# Altium PCB bc95.PcbDoc
Units mil, origin at the board's own origin, x right, y up, seen from the top; angles counter-clockwise.
Board outline 970.03 x 1995.03 mil, 2 copper layers (Top Layer, Bottom Layer); 47 components, 48 nets, 281 pads, 121 vias.
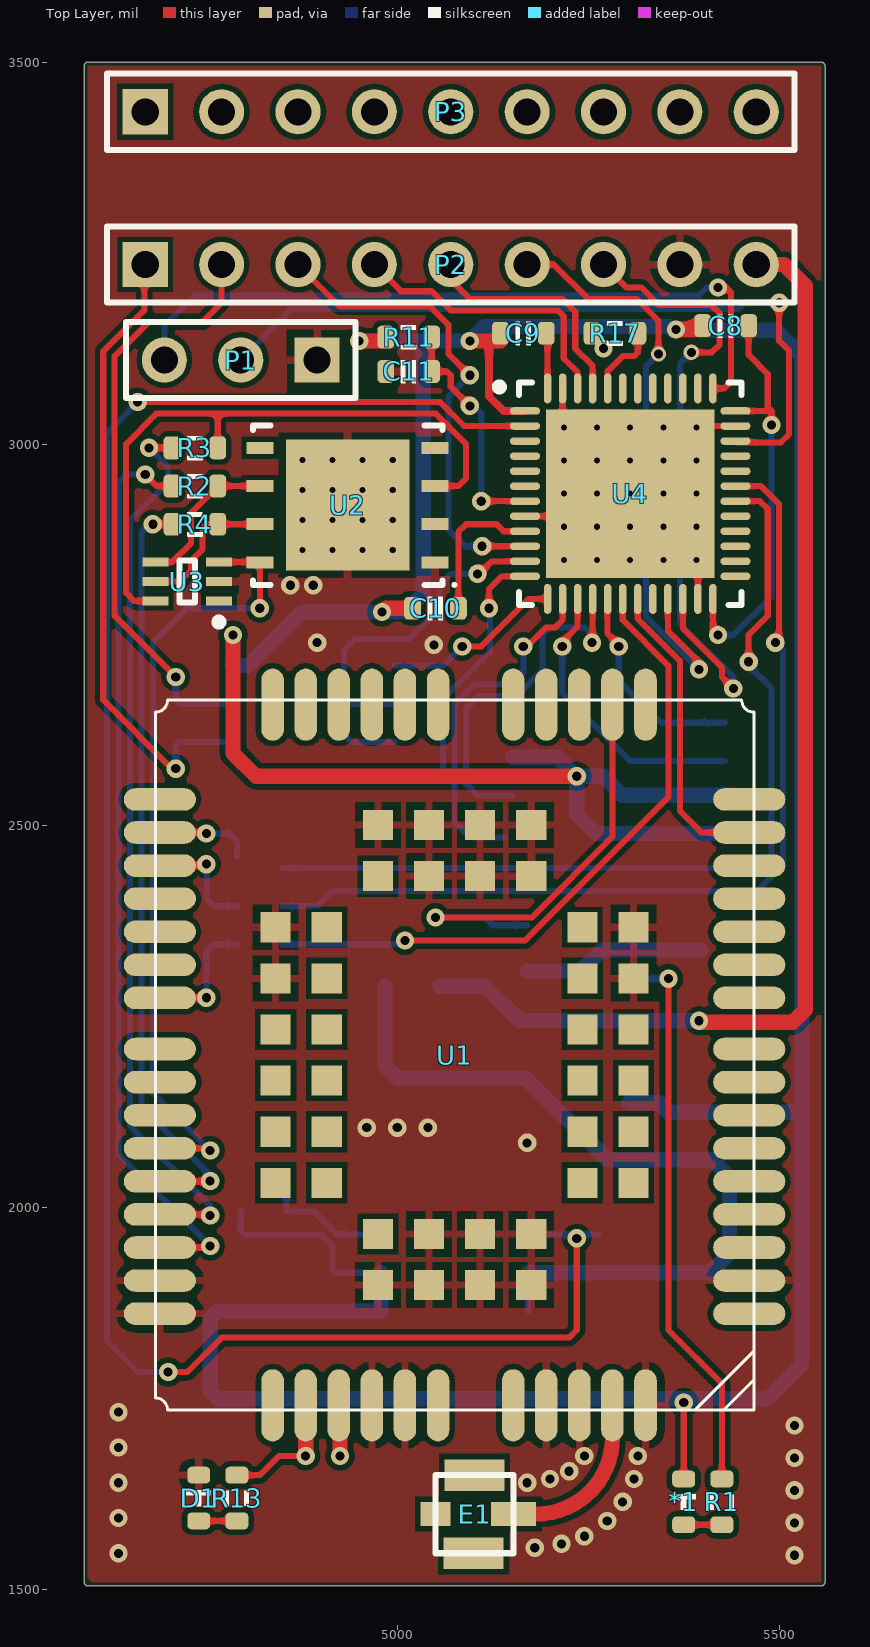
[diagram p0: Top Layer view]
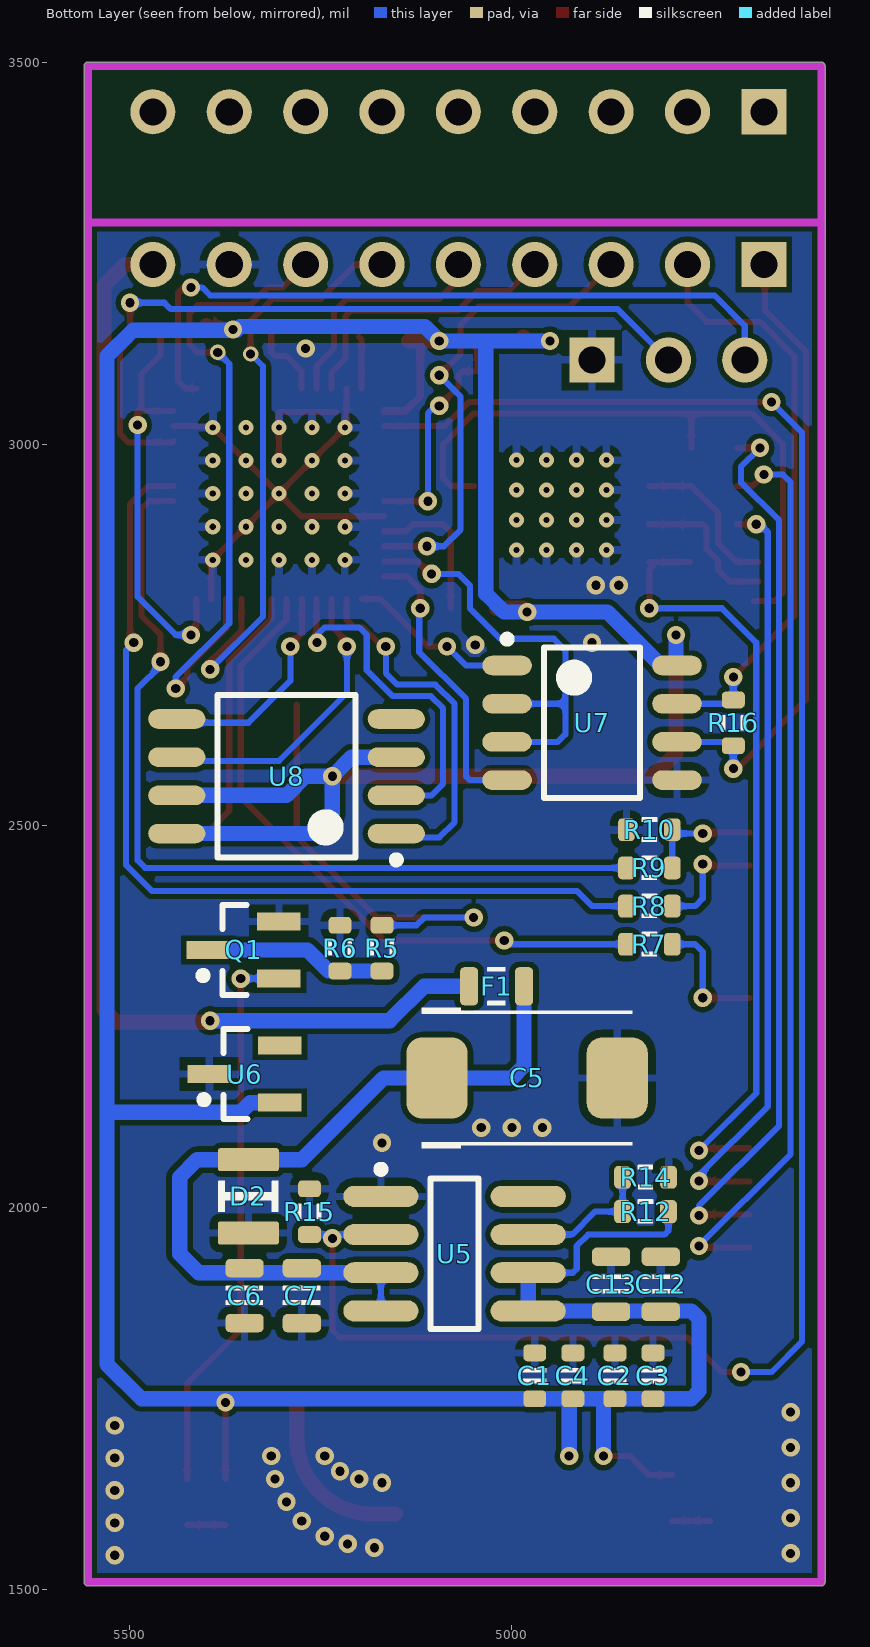
[diagram p1: Bottom Layer view, seen from below]
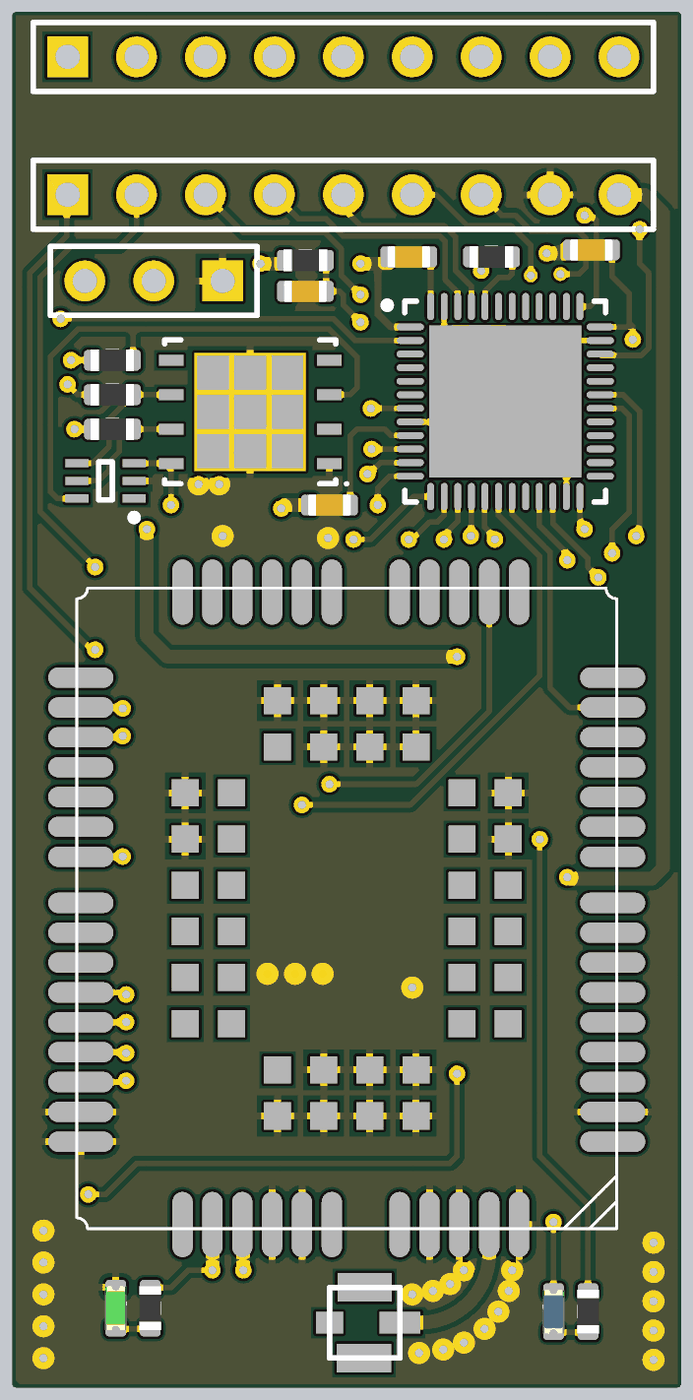
[diagram p2: 3D render of the assembled board from above, using the file's embedded part models]
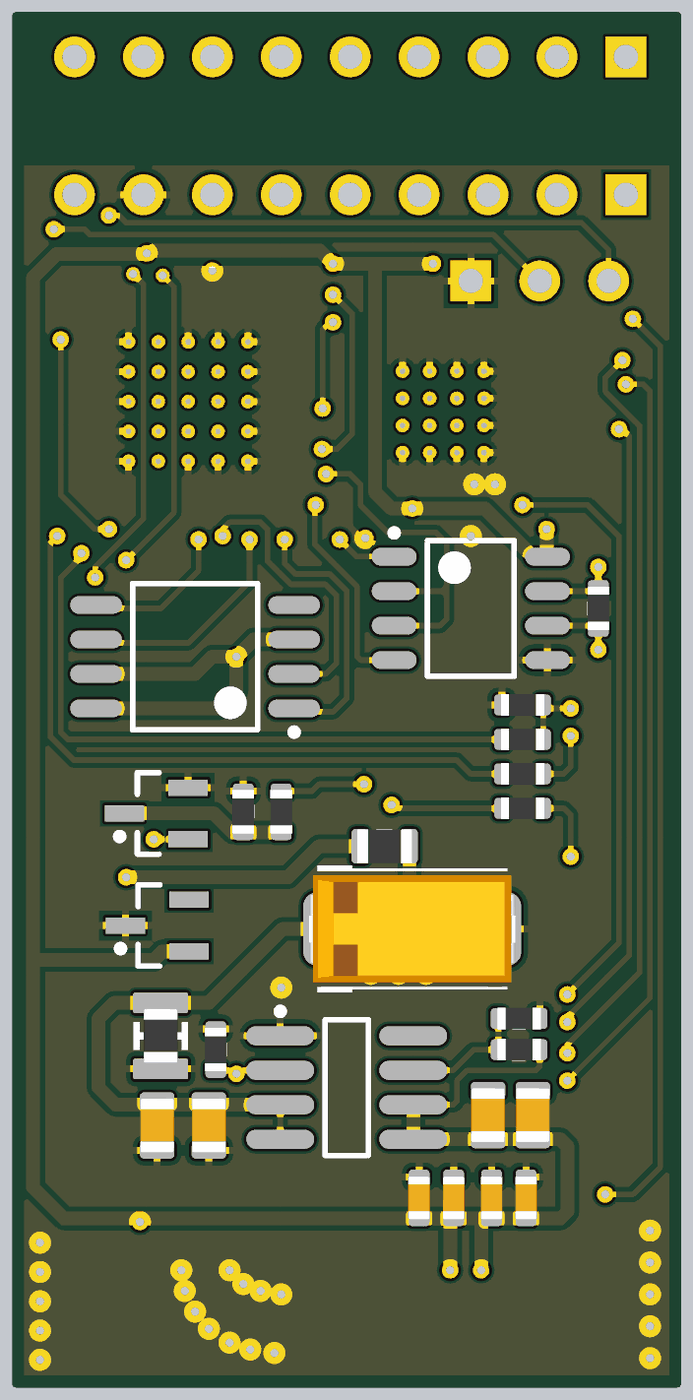
[diagram p3: 3D render of the assembled board from below, using the file's embedded part models]

## Layer stack, top to bottom
Top Solder: solder mask 0.4, Solder Resist, Dk 3.5
Top Layer: signal copper 1.4
Dielectric 1: dielectric 12.6, FR-4, Dk 4.8
Bottom Layer: signal copper 1.4
Bottom Solder: solder mask 0.4, Solder Resist, Dk 3.5

## Board outline
4589.98,1510 4589.98,3240 4589.98,3495 cw(c4595,3495) 4595,3500.01 5555,3500.01 cw(c5555,3495) 5560.01,3495 5560.01,3240 5560.02,1510 cw(c5555,1510) 5555,1504.98 4595,1504.98 cw(c4595,1510)

## Design rules (kind name [scope] priority, off if disabled: settings)
Clearance [All] p1: gap=7 ignorepadtopadclearanceinfootprint=FALSE
PolygonConnect [All] p1: connectstyle=Relief reliefconductorwidth=10 reliefentries=4 polygonreliefangle="90 Angle" airgapwidth=10
RoutingVias [All] p1: holewidth=28 width=50 viastyle="Through Hole" minholewidth=28 minwidth=50 maxholewidth=28 maxwidth=50
SolderMaskExpansion [All] p1: expansion=4
Width [All] p1: maxlimit=40 minlimit=6 preferedwidth=8
30 further rules are at their usual default settings.

## Components (designator, comment, footprint, x,y, rotation, side; value= is the part's Value field where it differs from the comment)
*1 "LED蓝" LED_0603_BLUE 5375,1615 r270 top
C1 "10uF" CAP_0603 4970,1780 r90 bottom
C2 "0.1uF" CAP_0603 4865,1780 r90 bottom
C3 "100pF" CAP_0603 4815,1780 r90 bottom
C4 "22pF" CAP_0603 4920,1780 r90 bottom
C5 "100uF/36V" CAP_TAN_D2917 4980,2170 r180 bottom
C6 "?F" CAP_0805 5350,1885 r90 bottom
C7 "?F" CAP_0805 5275,1885 r90 bottom
C8 "10uF" CAP_0603 5430,3155 r0 top
C9 "10uF" CAP_0603 5165,3145 r0 top
C10 "10uF" CAP_0603 5050,2785 r0 top
C11 "10uF" CAP_0603 5015,3095 r180 top
C12 "?F" CAP_0805 4805,1900 r270 bottom
C13 "?F" CAP_0805 4870,1900 r270 bottom
D1 "GRN" LED_0603_GREEN 4740,1620 r270 top
D2 "TVB035RSC-L" IND_1008 5345,2015 r270 bottom
E1 "Antenna" IPX 5110,1590 r270 top
F1 "16V/1A" RES_0805 5020,2290 r180 bottom
P1 "Header 3" HDR1X3 4895,3110 r180 top
P2 "Header 9" HDR1X9 4670,3235 r0 top
P3 "Header 9" HDR1X9 4670,3435 r0 top
Q1 "S8050" SOT23_M 5351.26,2337.6 r0 bottom
R1 "1K" RES_0603 5425,1615 r270 top
R2 "22R" RES_0603 4735,2945 r0 top
R3 "22R" RES_0603 4735,2995 r0 top
R4 "22R" RES_0603 4735,2895 r0 top
R5 "4.7K" RES_0603 5170,2340 r90 bottom
R6 "47K" RES_0603 5225,2340 r90 bottom
R7 "1K" RES_0603 4820,2345 r0 bottom
R8 "1K" RES_0603 4820,2395 r0 bottom
R9 "1K" RES_0603 4820,2445 r0 bottom
R10 "10K" RES_0603 4820,2495 r0 bottom
R11 "4.7K" RES_0603 5015,3140 r0 top
R12 "61.9K" RES_0603 4825,1995 r0 bottom
R13 "1K" RES_0603 4790,1620 r270 top
R14 "30.1K" RES_0603 4825,2040 r180 bottom
R15 "10K" RES_0603 5265,1995 r90 bottom
R16 "10K" RES_0603 4710,2635 r90 bottom
R17 "4.7K" RES_0603 5285,3145 r0 top
U1 "BC95_NBIOT" BC95 5075,2200 r180 top locked
U2 "USIM_SMD_9n" SON127P600X75_HS-9N 4935,2920 r180 top
U3 "SMF05C" SOT65P210X100-6N 4725,2820 r180 top
U4 "STM32L152CBU6" STM-UFQFPN48_M 5305,2935 r0 top
U5 "TPS76801" SO8_M 5075,1940 r180 bottom
U6 "MAX809SD/RD" SOT23_M 5350,2175 r0 bottom
U7 "MAX485CSA+" MAXM-MAX485CSA+-8_M 4895,2635 r180 bottom
U8 "W25Q16DVSSIG" WINB-W25Q16DVSSIG-8_M 5295,2565 r0 bottom

## Footprints (in the part's own frame and the unit in brackets; to place one, negate y for a bottom-side part, rotate by r counter-clockwise, add the part's x,y. Pads: shape width x height; smd on the part's side, far side on the other; paste and mask are expansions set on the pad)
BC95 [mm]
  oval 2.4x0.75 smd: 1(-9.8,8.6) 2(-9.8,7.5) 3(-9.8,6.4) 4(-9.8,5.3) 5(-9.8,4.2) 6(-9.8,3.1) 7(-9.8,2) 8(-9.8,0.9) 9(-9.8,-0.2) 10(-9.8,-1.9) 11(-9.8,-3) 12(-9.8,-4.1) 13(-9.8,-5.2) 14(-9.8,-6.3) 15(-9.8,-7.4) 16(-9.8,-8.5) 28(9.8,-8.5) 29(9.8,-7.4) 30(9.8,-6.3) 31(9.8,-5.2) 32(9.8,-4.1) 33(9.8,-3) 34(9.8,-1.9) 35(9.8,-0.2) 36(9.8,0.9) 37(9.8,2) 38(9.8,3.1) 39(9.8,4.2) 40(9.8,5.3) 41(9.8,6.4) 42(9.8,7.5) 43(9.8,8.6)
  oval 0.75x2.4 smd: 17(-6.35,-11.65) 18(-5.25,-11.65) 19(-4.15,-11.65) 20(-3.05,-11.65) 21(-1.95,-11.65) 22(0.55,-11.65) 23(1.65,-11.65) 24(2.75,-11.65) 25(3.85,-11.65) 26(4.95,-11.65) 27(6.05,-11.65) 44(6.05,11.65) 45(4.95,11.65) 46(3.85,11.65) 47(2.75,11.65) 48(1.65,11.65) 49(0.55,11.65) 50(-1.95,11.65) 51(-3.05,11.65) 52(-4.15,11.65) 53(-5.25,11.65) 54(-6.35,11.65)
  rect 1x1 smd: 55(-5.95,4.25) 56(-5.95,2.55) 57(-5.95,0.85) 58(-5.95,-0.85) 59(-5.95,-2.55) 60(-5.95,-4.25) 61(-2.55,-7.65) 62(-0.85,-7.65) 63(0.85,-7.65) 64(2.55,-7.65) 65(5.95,-4.25) 66(5.95,-2.55) 67(5.95,-0.85) 68(5.95,0.85) 69(5.95,2.55) 70(5.95,4.25) 71(2.55,7.65) 72(0.85,7.65) 73(-0.85,7.65) 74(-2.55,7.65) 75(-4.25,4.25) 76(-4.25,2.55) 77(-4.25,0.85) 78(-4.25,-0.85) 79(-4.25,-2.55) 80(-4.25,-4.25) 81(-2.55,-5.95) 82(-0.85,-5.95) 83(0.85,-5.95) 84(2.55,-5.95) 85(4.25,-4.25) 86(4.25,-2.55) 87(4.25,-0.85) 88(4.25,0.85) 89(4.25,2.55) 90(4.25,4.25) 91(2.55,5.95) 92(0.85,5.95) 93(-0.85,5.95) 94(-2.55,5.95)
  silkscreen extent -9.95,-11.8 9.95,11.8
CAP_0603 [mil]
  rrect50% 22x30 smd: 1(-30,0) 2(30,0)
  silkscreen extent -10,-15 10,15, body extent -31,-16 31,16, height 31
CAP_0805 [mil]
  rrect50% 24x50 smd: 1(-36,0) 2(36,0)
  silkscreen extent -12,-24 12,24, body extent -39,-25 39,25, height 39
CAP_TAN_D2917 [mil]
  rrect50% 80x106 smd: 1(-118,0) 2(118,0)
  silkscreen extent -138,-92 138,92, body extent -150,-78 150,78, height 122
HDR1X3 [mm] "Connector; Header; 3 Position"
  rect 1.5x1.5 hole 0.9: 1(0,0)
  round 1.5 hole 0.9: 2(2.54,0) 3(5.08,0)
  silkscreen extent -1.27,-1.27 6.35,1.27
HDR1X9 [mm] "Connector; Header; 9 Position"
  rect 1.5x1.5 hole 0.9: 1(0,0)
  round 1.5 hole 0.9: 2(2.54,0) 3(5.08,0) 4(7.62,0) 5(10.16,0) 6(12.7,0) 7(15.24,0) 8(17.78,0) 9(20.32,0)
  silkscreen extent -1.27,-1.27 21.59,1.27
IND_1008 [mil]
  rrect20% 30x80 smd: 1(-48,0) 2(48,0)
  silkscreen extent -20,-39 20,39, body extent -39,-25 39,25, height 39
IPX [mil]
  rect 41.5x78.74 smd: 0(-60,-9) 0(42.36,-10)
  rect 31.5x59.05 smd: 1(-9,42.36)
  rect 31.5x39.37 smd: ""(-9,-60)
  silkscreen extent -60,-60 42,42
LED_0603_BLUE [mil]
  rrect50% 22x30 smd: 1(-30,0) 2(30,0)
  silkscreen extent -10,-16 10,16, body extent -32,-16 32,16, height 24
LED_0603_GREEN [mil]
  rrect50% 22x30 smd: 1(-30,0) 2(30,0)
  silkscreen extent -10,-16 10,16, body extent -32,-16 32,16, height 24
MAXM-MAX485CSA+-8_M [mm] "SOIC, 8-Leads, Body 5x4mm, Pitch 1.27mm, IPC Low Density"
  oval 1.65x0.65 smd: 1(-2.825,1.905) 2(-2.825,0.635) 3(-2.825,-0.635) 4(-2.825,-1.905) 5(2.825,-1.905) 6(2.825,-0.635) 7(2.825,0.635) 8(2.825,1.905)
  silkscreen extent -2.95,-2.5 1.6,2.9, body extent -2,-2.5 2,2.5, height 1.75
RES_0603 [mil]
  rrect50% 22x30 smd: 1(-30,0) 2(30,0)
  silkscreen extent -10,-16 10,16, body extent -31,-16 31,16, height 18
RES_0805 [mil]
  rrect50% 24x50 smd: 1(-36,0) 2(36,0)
  silkscreen extent -12,-24 12,24, body extent -39,-25 39,25, height 24
SO8_M [mm] "SOIC, 8-Leads, Body 4.9x3.9mm, Pitch 1.27mm, IPC Low Density"
  oval 2.5x0.7 smd: 1(-2.45,1.905) 2(-2.45,0.635) 3(-2.45,-0.635) 4(-2.45,-1.905) 5(2.45,-1.905) 6(2.45,-0.635) 7(2.45,0.635) 8(2.45,1.905)
  silkscreen extent -2.58,-2.5 0.8,2.93, body extent -2,-2.5 2,2.5, height 1.75
SON127P600X75_HS-9N [mm] "SON, 8-Leads, Body 5.00x6.00mm, Pitch 1.27mm, Thermal Pad 4.35x4.10mm, IPC Medium Density"
  rect 0.9x0.4 smd: 1(-2.91,1.905) 2(-2.91,0.635) 3(-2.91,-0.635) 4(-2.91,-1.905) 5(2.91,-1.905) 6(2.91,-0.635) 7(2.91,0.635) 8(2.91,1.905)
  rect 4.1x4.35 smd paste-2.05: 9(0,0)
  silkscreen extent -3.6,-2.65 3.15,2.7, body extent -3,-2.5 3,2.5, height 0.75
SOT23_M [mm] "SOT23, 3-Leads, Body 2.9x1.3mm, Pitch 0.95mm, Lead Span 2.3mm - Reverse Pinning, IPC Low Density"
  rect 1.45x0.6 smd: 1(1.175,0) 2(-1.175,-0.95) 3(-1.175,0.95)
  silkscreen extent -0.1,-1.5 1.48,1.5, body extent -0.7,-1.5 0.7,1.5, height 1.1
SOT65P210X100-6N [mm] "SOT23, 6-Leads, Body 1.25x2.10mm, Pitch 0.65mm, IPC Medium Density"
  rect 0.85x0.3 smd: 1(-1.055,0.65) 2(-1.055,0) 3(-1.055,-0.65) 4(1.055,-0.65) 5(1.055,0) 6(1.055,0.65)
  silkscreen extent -1.18,-0.7 0.25,1.47, body extent -0.63,-0.67 0.63,0.68, height 1
STM-UFQFPN48_M [mm] "QFN, 48-Leads, Body 7.1x7.1mm, Pitch 0.5mm, Thermal Pad 5.6x5.6mm, IPC Low Density"
  oval 1x0.25 smd: 1(-3.5,2.75) 2(-3.5,2.25) 3(-3.5,1.75) 4(-3.5,1.25) 5(-3.5,0.75) 6(-3.5,0.25) 7(-3.5,-0.25) 8(-3.5,-0.75) 9(-3.5,-1.25) 10(-3.5,-1.75) 11(-3.5,-2.25) 12(-3.5,-2.75) 25(3.5,-2.75) 26(3.5,-2.25) 27(3.5,-1.75) 28(3.5,-1.25) 29(3.5,-0.75) 30(3.5,-0.25) 31(3.5,0.25) 32(3.5,0.75) 33(3.5,1.25) 34(3.5,1.75) 35(3.5,2.25) 36(3.5,2.75)
  oval 0.25x1 smd: 13(-2.75,-3.5) 14(-2.25,-3.5) 15(-1.75,-3.5) 16(-1.25,-3.5) 17(-0.75,-3.5) 18(-0.25,-3.5) 19(0.25,-3.5) 20(0.75,-3.5) 21(1.25,-3.5) 22(1.75,-3.5) 23(2.25,-3.5) 24(2.75,-3.5) 37(2.75,3.5) 38(2.25,3.5) 39(1.75,3.5) 40(1.25,3.5) 41(0.75,3.5) 42(0.25,3.5) 43(-0.25,3.5) 44(-0.75,3.5) 45(-1.25,3.5) 46(-1.75,3.5) 47(-2.25,3.5) 48(-2.75,3.5)
  rect 5.6x5.6 smd: 49(0,0)
  silkscreen extent -4.47,-3.7 3.7,3.7, body extent -3.55,-3.55 3.55,3.55, height 0.6
WINB-W25Q16DVSSIG-8_M [mm] "SOIC, 8-Leads, Body 5.4x5.4mm, Pitch 1.27mm, IPC Low Density"
  oval 1.9x0.65 smd: 1(-3.65,1.905) 2(-3.65,0.635) 3(-3.65,-0.635) 4(-3.65,-1.905) 5(3.65,-1.905) 6(3.65,-0.635) 7(3.65,0.635) 8(3.65,1.905)
  silkscreen extent -3.77,-2.7 2.3,2.9, body extent -2.7,-2.7 2.7,2.7, height 2.16

## Part data
C1 C8 C9 C10 C11: library part CAP_NP, "CAP 22uF 1210 25V 10%", MPN=GRM-RC1210-227K, Tolerance=10%, MFG=Murata
C2 C3 C4: library part CAP_NP, "CAP  0.1uF 0402 25V 10%", MPN=GRM-RC0402-104K, Part Number=132-000**, Tolerance=10%, Voltage=25V, CAD_APPROVED=Yes, HEIGHT=0.55MM, MFG=Murata, ROHS=Yes, Size=0402
C5: library part CAP_POL, "CAP 220UF 1010mm 35V 10%", MPN=C1210C476K8PAC, Tolerance=10%, MFG=Murata
C6 C7 C12 C13: library part Cap_0805, "Capacitor", Type=0805
D1: library part F5F1
D2: library part DIODE, "二极管 浪涌保 dm=35V,Ih=150mA DO-214AA SMB", MFG=TYCO, MPN=TVB035RSC-L
E1: "Generic Antenna", LatestRevisionDate=17-Jul-2002, LatestRevisionNote="Re-released for DXP Platform.", PackageReference=PIN1, Published=24-Mar-1999, Publisher="Altium Limited"
F1: library part FUSEHOLDER
P1: "Header, 3-Pin", LatestRevisionDate=17-Jul-2002, LatestRevisionNote="Re-released for DXP Platform.", Publisher="Altium Limited"
P2 P3: "Header, 9-Pin", LatestRevisionDate=17-Jul-2002, LatestRevisionNote="Re-released for DXP Platform.", Publisher="Altium Limited"
Q1: library part QNPN, "NPN Bipolar Transistor", Code_JEDEC=SOT-23, LatestRevisionDate=17-Jul-2002, LatestRevisionNote="Re-released for DXP Platform.", PackageReference=SOT-23B, Published=8-Jun-2000, Publisher="Altium Limited"
R1 R5 R6 R11 R17: library part Res, "Resistor", LatestRevisionDate=17-Jul-2002, LatestRevisionNote="Re-released for DXP Platform.", PackageReference=AXIAL-0.4, Published=8-Jun-2000, Publisher="Altium Limited"
R2 R3 R4 R7 R8 R9 R10 R12 R14 R15 R16: library part RES, MPN=RC1206JR-07330R, Tolerance=5%, MFG=Yageo, ROHS=Yes
R13: library part RES, MPN=RC0402JR-07330R, Tolerance=5%, HEIGHT=0.55MM
U1: library part BC95_NBIOT_4
U3: library part SMF05C_0
U4: library part CMP-0236-00012-4, "ARM Cortex-M3 32-bit MCU, 128 KB Flash, 16 KB Internal RAM, 37 I/Os, 48-pin UFQFPN, -40 to 85 degC, Tray", I/Os (High Current)=37, Operating Frequency(F) (Processor speed) (MHz)=32, Supply Voltage(Vcc) min (V)=1.65, ComponentLink1Description="Manufacturer URL", ComponentLink1URL=http://www.st.com/web/en/home.html, ComponentLink2Description=Datasheet, ComponentLink2URL=http://www.st.com/st-web-ui/static/active/en/resource/technical/document/datasheet/CD00277537.pdf, ComponentLink3Description="Package Specification", ComponentLink3URL=http://www.st.com/st-web-ui/static/active/en/resource/technical/document/data_brief/DM00071938.pdf, Core="ARM Cortex-M3", D/A Converter="2x12-bit (2 Channel)", Data E2PROM nom (B)=4096, DatasheetVersion="Rev. 8", FLASH Size (Prog) (kB)=128, Internal RAM Size (kB)=16, Mounting Technology="Surface Mount", PackageDescription="48-Pin Ultra Thin Fine Pitch Quad Flat No-Lead, 7 x 7 x 0.6 mm Body, 0.5 mm Pitch, Exposed Pad", PackageReference=UFQFPN48, PackageVersion="Rev. 1, 04/2013", Packing=Tray, PartId=1, PartNumber=STM32L152CBU6
U5: library part TPS768XX_1
U7: library part CMP-2000-05211-1, "Low-Power, Slew-Rate-Limited RS-485/RS-422 Transceiver, 4.75 to 5.25 V, 0 to 70 degC, 8-Pin SOIC, RoHS, Tape and Reel", Digital IC Case Style=SOIC, IC Temperature Range=Commercial, Manufacturer=Maxim, Operating Temperature Max=70degC, Operating Temperature Min=0degC, Operating Temperature Range=0degCto+70degC, Supply Current=500μA, Supply Voltage Max=5.25V, Supply Voltage Min=4.75V, Supply Voltage Range=4.75Vto5.25V, Base Number=485, Data Rate=2.5Mbps, Datasheet URL=https://datasheet.ciiva.com/29306/170071-da-01-en-ic-max485csa-so8-29306144.pdf, Datasheet Version="Rev. 8, 10/2003", Device Marking=MAX485CSA+, Device Type=Transceiver, Driver Case Style=SOIC, IC Generic Number=485, Interface=RS-422/RS-485, Interface Type=RS422,RS485, Line / Bus Driver / Receiver / Transceiver Type=CMOSDifferential, Logic Function Number=485, Manufacturer URL=http://www.maximintegrated.com/, No. of Drivers=1, No. of Pins=8, No. of Receivers=1, Package / Case=SOIC, Transceiver Type=Differential
U8: library part CMP-2000-05434-1, "IC FLASH 16MBIT 104MHZ 8SOIC", Manufacturer=Winbond, Operating Supply Voltage (Max)=3.6V, Operating Supply Voltage (Min)=2.7V, Operating Supply Voltage (Typ)=3/3.3V, Operating Temperature (Max)=85C, Operating Temperature (Min)=-40C, Operating Temperature Classification=Industrial, Operating Temp Range=-40Cto85C, Package Type=SOICW, Program/Erase Volt (Typ)=2.7to3.6V, Supply Current=18mA, Access Time (Max)=7ns, Address Bus=24b, Boot Type=Bottom/Top, Cell Type=NOR, Datasheet URL=https://ciiva.com/datasheet-click-14728450?src=ciiva&sig=bd4f4644, Datasheet Version="Rev. D, 10/2012", Density=16777216Bit, Interface Type=Serial(SPI), Manufacturer URL=http://www.winbond.com/hq/index.html?__locale=en, Mounting=SurfaceMount, Number of Words=2M, Pin Count=8, Programmable=Yes, Rad Hardened=No, Sync/Async=Synchronous, Word Size=8b

## Via types
v1: diameter 24, hole 12, Top Layer to Bottom Layer, 78 vias
v2: diameter 19.68, hole 7.87, Top Layer to Bottom Layer, 41 vias
v3: diameter 20, hole 12, Top Layer to Bottom Layer, 2 vias

## Nets (pads, with @x,y where several pads share a name; then routed paths per layer and width w, separated by ;. In a path a pad name is that pad's centre, name@x,y a point inside that pad or via, vN(x,y) a via of type N, cw(c..) or ccw(c..) an arc to the next point about the centre after c; other vN are vias at no path point)
3V6_EN#: R15.1 U4.2 U5.2 | length 2629.7
  Top Layer w8: v1@4665,3055 5056.21,3055 5087.63,3023.58 U4.2 ; v1(4700,1785) 4725,1785 4770,1830 5225,1830 5235,1840 v1(5235,1960)
  Bottom Layer w8: v1(4660,3055) 4620,3015 4620,1825 4660,1785 v1(4700,1785) ; U5.2 R15.1
485_A: P2.1 R16.1 U7.6 | length 830.9
  Top Layer w8: P2.1 4668.79,3233.79 4668.79,3175 4615,3121.21 4615,2665 4705,2575 v1(4710,2575)
  Bottom Layer w8: v1(4710,2575) R16.1 4715,2610 U7.6
485_B: P2.2 R16.2 U7.7 | length 778
  Top Layer w8: v1(4710,2695) 4630,2775 4630,3115 4675,3160 4745,3160 4770,3185 P2.2
  Bottom Layer w8: v1(4710,2695) R16.2 4715,2660 U7.7
485_DIR: U4.11 U7.2 U7.3 | length 549.6
  Top Layer w8: v1(5105,2830) 5107.53,2830 5123.94,2846.42 U4.11
  Bottom Layer w8: U7.3@4996.22,2610 4940,2610 4930,2620 4930,2660 ; U7.2@4996.22,2660 4930,2660 ; v1(5105,2830) 5070,2830 5055,2815 5055,2785 5015,2745 4945,2745 4930,2730 4930,2660
+12: F1.1 P2.9 | length 1528
  Top Layer w20: v1(5395,2245) 5396.96,2243.04 5518.04,2243.04 5534,2259 5534,3207.53 5506.53,3235 P2.9
  Bottom Layer w20: F1.1 5115,2290 5160,2245 v1(5395,2245)
ANT: E1.1 U1.53 | length 228.7
  Top Layer w20: E1.1 5181.69,1599 ccw(c5181.69,1699) 5281.69,1699 U1.53
CLk: P1.3 U4.37 | length 954.2
  Top Layer w8: U4.37 5427.8,3072.8 5437,3082 5437,3198 5430,3205 v1(5420,3205)
  Bottom Layer w8: P1.3 4695,3155 4734.47,3194.47 5395,3194.47 5405.53,3205 v1(5420,3205)
DIO: P1.2 U4.34 | length 989
  Top Layer w8: U4.34 5444.69,3002 5502,3002 5513,3013 5513,3122 5500,3135 v1(5500,3185)
  Bottom Layer w8: P1.2 4862,3177 5447,3177 5455,3185 v1(5500,3185)
GND: C1.2 C2.2 C3.2 C4.2 C5.2 C6.1 C7.1 C11.2 C12.1 C13.1 D1.1 D2.2 P1.1 P2.8 Q1.2 R6.2 R10.2 R14.2 R15.2 R17.1 U1.2 U1.42 U1.43 U1.47 U1.48 U1.51 U1.52 U1.54 U1.59 U1.60 U1.61 U1.62 U1.63 U1.64 U1.65 U1.66 U1.71 U1.72 U1.73 U1.74 U1.81 U1.82 U1.83 U1.92 U1.93 U1.94 U2.1 U2.9 U3.2 U4.8 U4.23 U4.35 U4.47 U4.49 U5.1 U6.1 U7.5 | length 812.8
  Top Layer w8: U4.8 5275.47,2905.47 v2(5305,2935) ; U4.47 5216.42,3023.58 v2(5218.39,3021.61) v2(5261.69,2978.31) v2(5305,2935) ; U4.49@5229.51,3042.11 5305,3042.11 v2(5305,3021.61) v2(5305,2978.31) ; U4.23 5393.58,2846.42 v2(5391.61,2848.39) v2(5348.31,2891.69) v2(5305,2935) ; U4.35 5393.58,3023.58 v2(5348.31,2978.31) v2(5305,2935)
  other v1: 5520,1545 4635,1547.5 5180,1555 5215,1560 5245,1570 5520,1587.5 5275,1590 4635,1593.75 5295,1615 5520,1630 4635,1640 5170,1640 5200,1645 5310,1645 5225,1655 5520,1672.5 5245,1675 5315,1675 4635,1686.25 5520,1715 4635,1732.5 5170,2085 4960,2105 5000,2105 5040,2105 5047.93,2737.07 4895,2740 4860,2815 4890,2815 5270,3125
  other v2: 5218.39,2848.39 5261.69,2848.39 5305,2848.39 5348.31,2848.39 4875.94,2860.94 4915.31,2860.94 4954.69,2860.94 4994.06,2860.94 5218.39,2891.69 5261.69,2891.69 5305,2891.69 5391.61,2891.69 4875.94,2900.32 4915.31,2900.32 4954.69,2900.32 4994.06,2900.32 5218.39,2935 5261.69,2935 5348.31,2935 5391.61,2935 4875.94,2939.68 4915.31,2939.68 4954.69,2939.68 4994.06,2939.68 5218.39,2978.31 5391.61,2978.31 4875.94,2979.06 4915.31,2979.06 4954.69,2979.06 4994.06,2979.06 5261.69,3021.61 5348.31,3021.61 5391.61,3021.61
IIC_SCL: P2.5 U4.45 | length 310.2
  Top Layer w8: P2.5 5070,3215 5095,3190 5216.21,3190 5233,3173.21 5233,3125 5255.79,3102.21 U4.45
IIC_SDA: P2.4 U4.46 | length 377.9
  Top Layer w8: P2.4 5005,3200 5045,3200 5070,3175 5210,3175 5218,3167 5218,3112 5236.1,3093.9 U4.46
MISO: U4.16 U8.2 | length 474
  Top Layer w8: v1(5255,2740) 5255.79,2740.79 U4.16
  Bottom Layer w8: U8.2 5105,2540 5090,2555 5090,2653.79 5106.21,2670 5156.21,2670 5190,2703.79 5190,2750 5200,2760 5245,2760 5255,2750 v1(5255,2740)
MOSI: U4.17 U8.5 | length 275.1
  Top Layer w8: U4.17 5275,2796.73 5275,2752.53 5290,2737.53 v1(5290,2735)
  Bottom Layer w8: v1(5290,2735) 5290,2690 5345,2635 U8.5@5428.7,2635
Net*1_2: *1.2 R1.2 | length 50
  Top Layer w8: *1.2 R1.2
NetC5_1: C5.1 C6.2 C7.2 D2.1 F1.2 U5.3 U5.4 | length 1039.4
  Bottom Layer w8: U5.4 U5.3
  Bottom Layer w20: F1.2 4984,2186 5000,2170 C5.1 5168,2170 5275,2063 D2.1 5412,2063 5435,2040 5435,1940 5410,1915 U5.3
NetC8_2: C8.2 U4.24 U4.36 | length 555.3
  Top Layer w8: U4.24 5413.27,2756.73 v1(5420,2750) ; U4.36 5490,3043.27 ; C8.2 5460,3116.63 5485,3091.63 5485,3048.27 5490,3043.27 ; v1(5490,3025) 5490,3043.27
  Bottom Layer w8: v1(5420,2750) 5440,2750 5490,2800 v1(5490,3025)
NetC9_2: C9.2 U4.48 | length 68.6
  Top Layer w8: U4.48 5196.73,3136.73 C9.2@5200,3140
NetC10_2: C10.2 U4.9 | length 195.2
  Top Layer w8: C10.2 5080,2885 5090,2895 5130,2895 5139.21,2885.79 U4.9
NetC11_1: C11.1 R11.2 U4.7 | length 308.8
  Top Layer w8: C11.1 R11.2 ; C11.1@5050,3095 5065,3095 5070,3090 5070,3075 v1(5095,3050) ; v1(5110,2925) 5110.16,2925.16 U4.7
  Bottom Layer w8: v1(5095,3050) 5100,3050 5110,3040 v1(5110,2925)
NetD1_2: D1.2 R13.2 | length 50
  Top Layer w8: D1.2 R13.2
NETLIGHT: R5.2 U1.18 | length 572.6
  Top Layer w8: v1(5050,2380) 5176.07,2380 5281.69,2485.62 U1.18
  Bottom Layer w8: v1(5050,2380) 5115,2380 5125,2370 R5.2
NetQ1_1: Q1.1 R5.1 R6.1 | length 239
  Bottom Layer w20: R5.1 R6.1 5240,2310 5267.6,2337.6 Q1.1
NetQ1_3: Q1.3 R1.1 | length 741.1
  Top Layer w8: v1(5355,2300) 5355,1840 5425,1770 R1.1
  Bottom Layer w8: Q1.3 5349.8,2300.2 5355,2295 v1(5355,2300)
NetR2_1: R2.1 U1.41 | length 1196.7
  Top Layer w8: v1(4670,2960) 4685,2945 R2.1 ; U1.41 4753.03,1948.03 v1(4755,1950)
  Bottom Layer w8: v1(4670,2960) 4645,2960 4635,2950 4635,2070 v1(4755,1950)
NetR3_1: R3.1 U1.40 | length 1175.9
  Top Layer w8: v1(4675,2995) R3.1 ; U1.40 4753.66,1991.34 v1(4755,1990)
  Bottom Layer w8: v1(4675,2995) 4700,2970 4700,2950 4650,2900 4650,2107.47 4755,2002.47 v1(4755,1990)
NetR4_1: R4.1 U1.39 | length 997.4
  Top Layer w8: v1(4680,2895) R4.1 ; U1.39 4754.65,2034.65 v1(4755,2035)
  Bottom Layer w8: v1(4680,2895) 4675,2895 4665,2885 4665,2132.47 4755,2042.47 v1(4755,2035)
NetR7_1: R7.1 U1.34 | length 165.1
  Top Layer w8: U1.34 4749.8,2274.8 v1(4750,2275)
  Bottom Layer w8: v1(4750,2275) 4750,2335 4760,2345 R7.1
NetR8_1: R8.1 U1.30 | length 150.8
  Top Layer w8: U1.30 4748.03,2448.03 v1(4750,2450)
  Bottom Layer w8: v1(4750,2450) 4750,2405 4760,2395 R8.1
NetR9_1: R9.1 R10.1 U1.29 | length 125.5
  Top Layer w8: U1.29 4748.66,2491.34 v1(4750,2490)
  Bottom Layer w8: v1(4750,2490) 4780,2490 4790,2480 4790,2460
NetR12_2: R12.2 R14.1 U5.7 | length 176
  Bottom Layer w8: R14.1@4855,2035 R12.2 4891.21,1995 4921.21,1965 U5.7
NetR17_2: R17.2 U4.44 | length 97.4
  Top Layer w8: U4.44 5275.47,3095.47 5295,3115 5310,3115 5315,3120 R17.2
NRST#: U1.15 U4.19 | length 402.8
  Top Layer w8: U4.19 5314.84,2771.37 5370,2716.21 5370,2520 5398.66,2491.34 U1.15
Nss: U4.14 U8.1 | length 464.4
  Top Layer w8: v1(5165,2735) 5170,2735 5195,2760 5206.59,2760 5216.42,2769.82 U4.14
  Bottom Layer w8: U8.1@5141.3,2485 5095,2485 5075,2505 5075,2660 5100,2685 5150,2685 5165,2700 v1(5165,2735)
RI: R7.2 U4.18 | length 869.1
  Top Layer w8: v1(5010,2350) 5167.28,2350 5355,2537.72 5355,2710 5295.16,2769.84 U4.18
  Bottom Layer w8: R7.2 5005,2345 v1(5010,2350)
RST#: U6.2
Sck: U4.15 U8.6 | length 381.1
  Top Layer w8: v1(5216,2735) 5216,2741 5236.1,2761.1 U4.15
  Bottom Layer w8: v1(5216,2735) 5216,2674 5305,2585 U8.6@5428.7,2585
SIM_CLK: R2.2 U2.6 U3.4 | length 208.1
  Top Layer w8: U3.4@4676.93,2845.59 U3.4 4705.59,2845.59 4730,2870 4730,2910 R2.2 U2.6
SIM_DATA: R3.2 U2.3 U3.6 | length 850.6
  Top Layer w8: U3.6 4655.59,2794.41 4645,2805 4645,3000 4685,3040 4765,3040 ; R3.2 4765,3040 ; U2.3 5080,2945 5090,2955 5090,3000 5050,3040 4765,3040
SIM_RST: R4.2 U2.7 U3.5 | length 198
  Top Layer w8: U3.5@4676.93,2820 U3.5 4715,2820 4730,2835 4730,2847.25 4745,2862.25 4745,2890 4750,2895 R4.2 U2.7
SIM_VCC: U1.38 U2.8 U3.3 | length 1039.7
  Top Layer w8: U1.38 4752.05,2077.95 v1(4755,2075) ; U3.3 4819.84,2845.59 4815,2840.75 4820,2835.75 v1(4820,2785)
  Bottom Layer w8: v1(4755,2075) 4680,2150 4680,2740 4725,2785 v1(4820,2785)
USART1_RX: R8.2 U4.31 | length 1222.9
  Top Layer w8: U4.31 5476.37,2944.84 5500,2921.21 5500,2745 v1(5495,2740)
  Bottom Layer w8: R8.2 4895,2395 4915,2415 5471.21,2415 5505,2448.79 5505,2730 v1(5495,2740)
USART1_TX: R9.2 U4.30 | length 1173.3
  Top Layer w8: U4.30 5474.84,2925.16 5485,2915 5485,2775 5460,2750 v1(5460,2715)
  Bottom Layer w8: R9.2 5480,2445 5490,2455 5490,2680 5460,2710 v1(5460,2715)
USART2_RX: U4.13 U7.1 | length 236.6
  Top Layer w8: v1(5085,2735) 5110,2735 5172.2,2797.2 U4.13
  Bottom Layer w8: U7.1@4996.22,2710 5060,2710 v1(5085,2735)
USART2_TX: U4.12 U7.4 | length 390.8
  Top Layer w8: v1(5120,2785) 5120,2810 5136.73,2826.73 U4.12
  Bottom Layer w8: U7.4@4996.22,2560 U7.4 5055,2560 5060,2565 5060,2666.21 5121.21,2727.43 5121.21,2783.79 v1(5120,2785)
USART3_RX: P2.7 U4.22 | length 880.6
  Top Layer w8: P2.7 5300,3205 5319.55,3205 5342.55,3182 5411.33,3182 5422,3171.33 5422,3130 5412,3120 v3(5385,3120) ; U4.22 5373.9,2758.63 5425,2707.53 5425,2695 v1(5440,2680)
  Bottom Layer w8: v3(5385,3120) 5370,3105 5370,2765 5440,2695 v1(5440,2680)
USART3_TX: P2.6 U4.21 | length 803.3
  Top Layer w8: P2.6 5205,3235 5250,3190 5313.33,3190 5342,3161.33 v3(5342,3118) ; U4.21 5354.21,2755.79 5395,2715 v1(5395,2705)
  Bottom Layer w8: v3(5342,3118) 5325.84,3101.84 5325.84,2774.16 v1(5395,2705)
VCC_BC95: *1.1 C1.1 C2.1 C3.1 C4.1 C8.1 C9.1 C10.1 C12.2 C13.2 R11.1 R12.1 R13.1 U1.45 U1.46 U4.1 U5.5 U5.6 U6.3 U7.8 U8.3 U8.7 U8.8 | length 6187.2
  Top Layer w8: R13.1 4820,1650 4845,1675 v1(4880,1675) ; *1.1 v1(5375,1745)
  Top Layer w10: 5120,3135 5120,3062.63 5139.36,3043.27 U4.1
  Top Layer w20: v1(4785,2750) 4785,2595 4815,2565 v1(5235,2565) ; v1(4880,1675) 4880.12,1675.12 U1.45 ; U1.46 4925,1739.76 v1(4925,1675) ; v1(4950,3135) 4980,3135 R11.1 ; v1(4980,2780) 4985,2785 C10.1 ; v1(5095,3135) 5120,3135 C9.1@5135,3135 ; v1(5365,3150) 5395,3150 C8.1
  Bottom Layer w8: R12.1 4795,1970 4800,1965 4900,1965 4915,1950 4915,1920 4920,1915 U5.6
  Bottom Layer w20: v1(4785,2750) 4785,2711.22 U7.8 4805,2710 4875,2780 v1(4980,2780) 5010,2780 5034,2804 5034,3134 5035,3135 ; v1(4880,1675) 4880,1750 ; v1(4925,1675) 4925,1745 C4.1 ; v1(4950,3135) 5035,3135 ; U5.6 U5.5 4765,1865 4755,1855 4755,1760 4765,1750 C3.1 C2.1 4880,1750 ; U8.3 5210,2590 v1(5235,2565) ; U6.3 5342.4,2137.6 5355,2125 5530,2125 ; v1@5361,3149 5356,3154 5114,3154 v1(5095,3135) 5035,3135 ; v1@5369,3149 5496,3149 5530,3115 5530,2125 ; U8.8 5260,2490 5235,2515 v1(5235,2565) ; U8.7 5295,2540 5270,2565 v1(5235,2565) ; 4880,1750 C4.1 ; C4.1 C1.1 5485,1750 5530,1795 5530,2125
WKUP: P2.3 U4.10 | length 630.4
  Top Layer w8: P2.3 4925,3180 5043.33,3180 5067,3156.33 5067,3118 v1(5095,3090) ; v1(5111.1,2866.1) U4.10
  Bottom Layer w8: v1(5095,3090) 5067,3062 5067,2888 5088.9,2866.1 v1(5111.1,2866.1)
pads on no net: E1. E1.0 P3.1 P3.2 P3.3 P3.4 P3.5 P3.6 P3.7 P3.8 P3.9 U1.1 U1.3 U1.4 U1.5 U1.6 U1.7 U1.8 U1.9 U1.10 U1.11 U1.12 U1.13 U1.14 U1.16 U1.17 U1.19 U1.20 U1.21 U1.22 U1.23 U1.24 U1.25 U1.26 U1.27 U1.28 U1.31 U1.32 U1.33 U1.35 U1.36 U1.37 U1.44 U1.49 U1.50 U1.55 U1.56 U1.57 U1.58 U1.67 U1.68 U1.69 U1.70 U1.75 U1.76 U1.77 U1.78 U1.79 U1.80 U1.84 U1.85 U1.86 U1.87 U1.88 U1.89 U1.90 U1.91 U2.2 U2.4 U2.5 U3.1 U4.3 U4.4 U4.5 U4.6 U4.20 U4.25 U4.26 U4.27 U4.28 U4.29 U4.32 U4.33 U4.38 U4.39 U4.40 U4.41 U4.42 U4.43 U5.8 U8.4

## Polygon pours and split planes (outlines as drawn)
GND on Bottom Layer "Bottom Layer-GND" (solid, remove dead copper, pour order 10): 4600,3525 4615,3510 5580,3510 5580,1500 5560,1480 5555,1485 4565,1485 4565,3485 4600,3520
GND on Top Layer "Top Layer-GND" (solid, remove dead copper, pour order 22): 4595,3495 5555,3495 5555,1510 4600,1510 4595,1515

## Keep-outs
Bottom Layer:
  lines w10: 4645,3495 5555,3495 5555,3290 4595,3290 ; 4655,3495 4595,3495 4595,3290 ; 5555,3305 5555,3240 5555,1510 4595,1510 4595,3240 4595,3290

## Other copper
Bottom Layer:
  pour cut-out: 5462.5,3005 5462.5,3035 5477.5,3050 5507.5,3050 5512.5,3045 5517.5,3045